# Altium PCB PCB1.PcbDoc
Units mil, origin at the board's own origin, x right, y up, seen from the top; angles counter-clockwise.
Board outline 6000 x 4000 mil, 2 copper layers (Top Layer, Bottom Layer); 12 components, 8 nets, 42 pads, 8 vias.
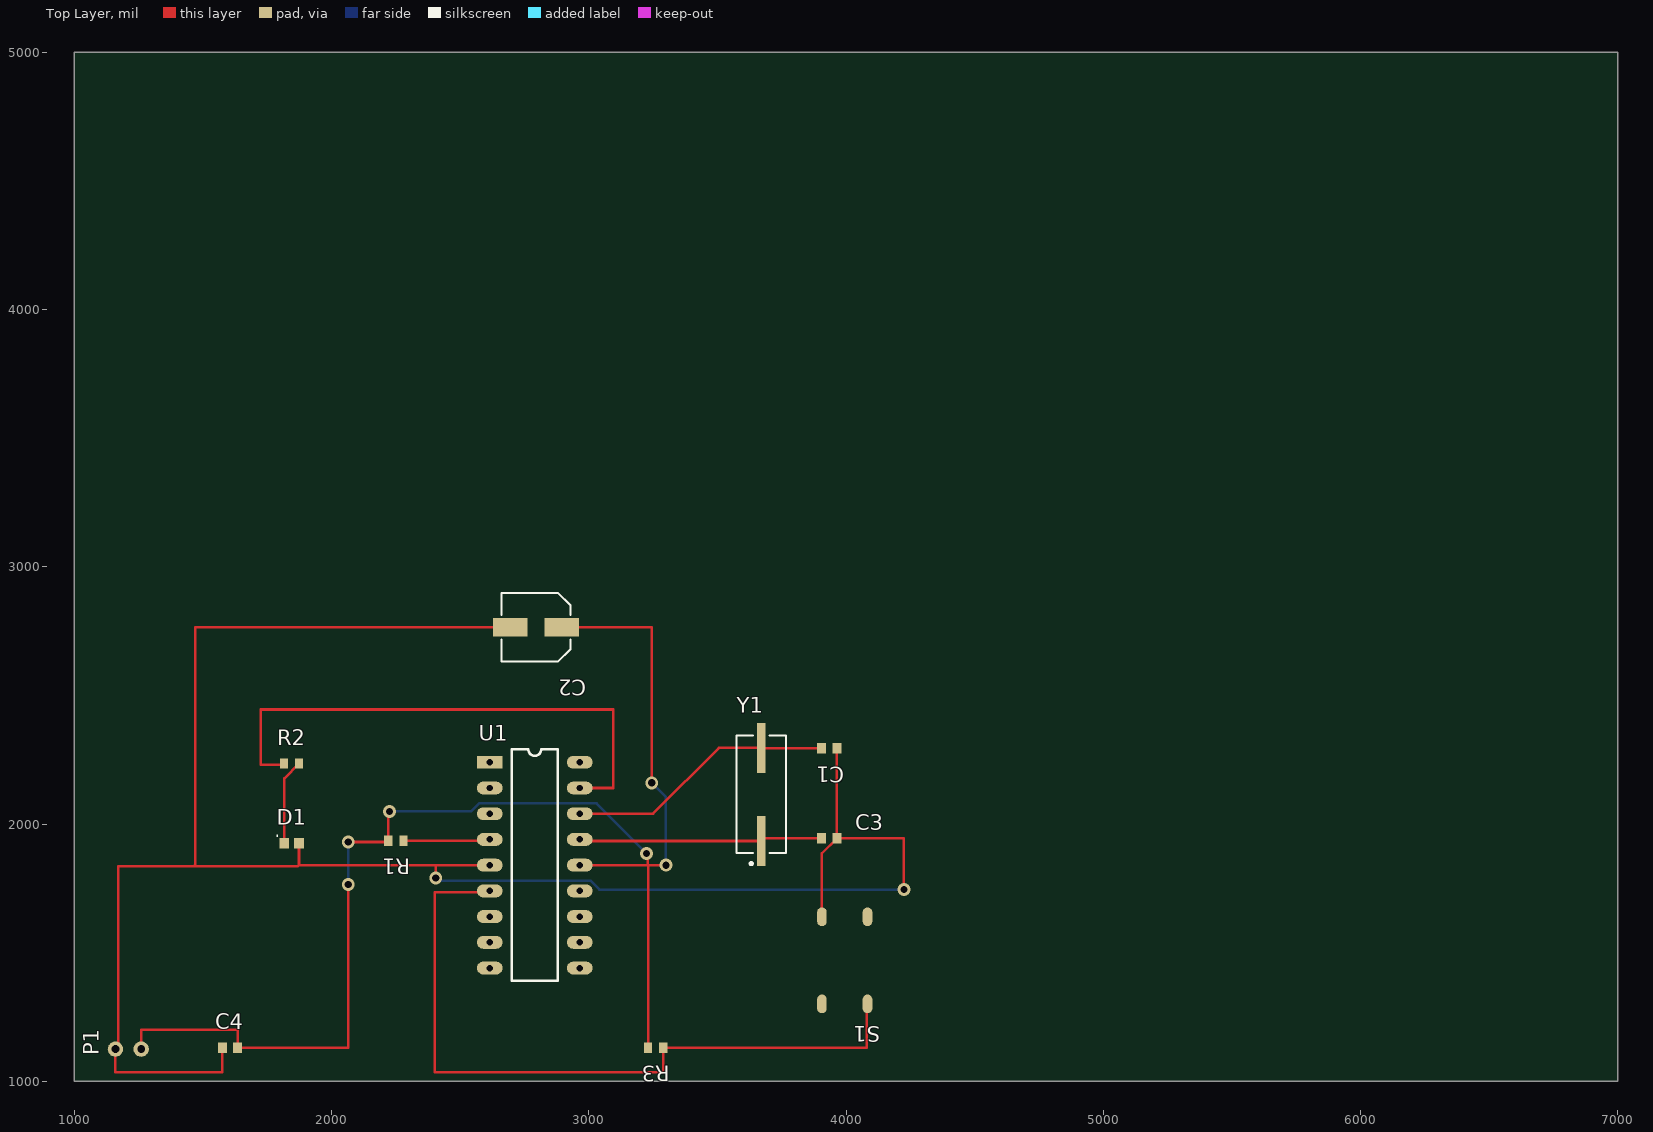
[diagram p0: Top Layer view]
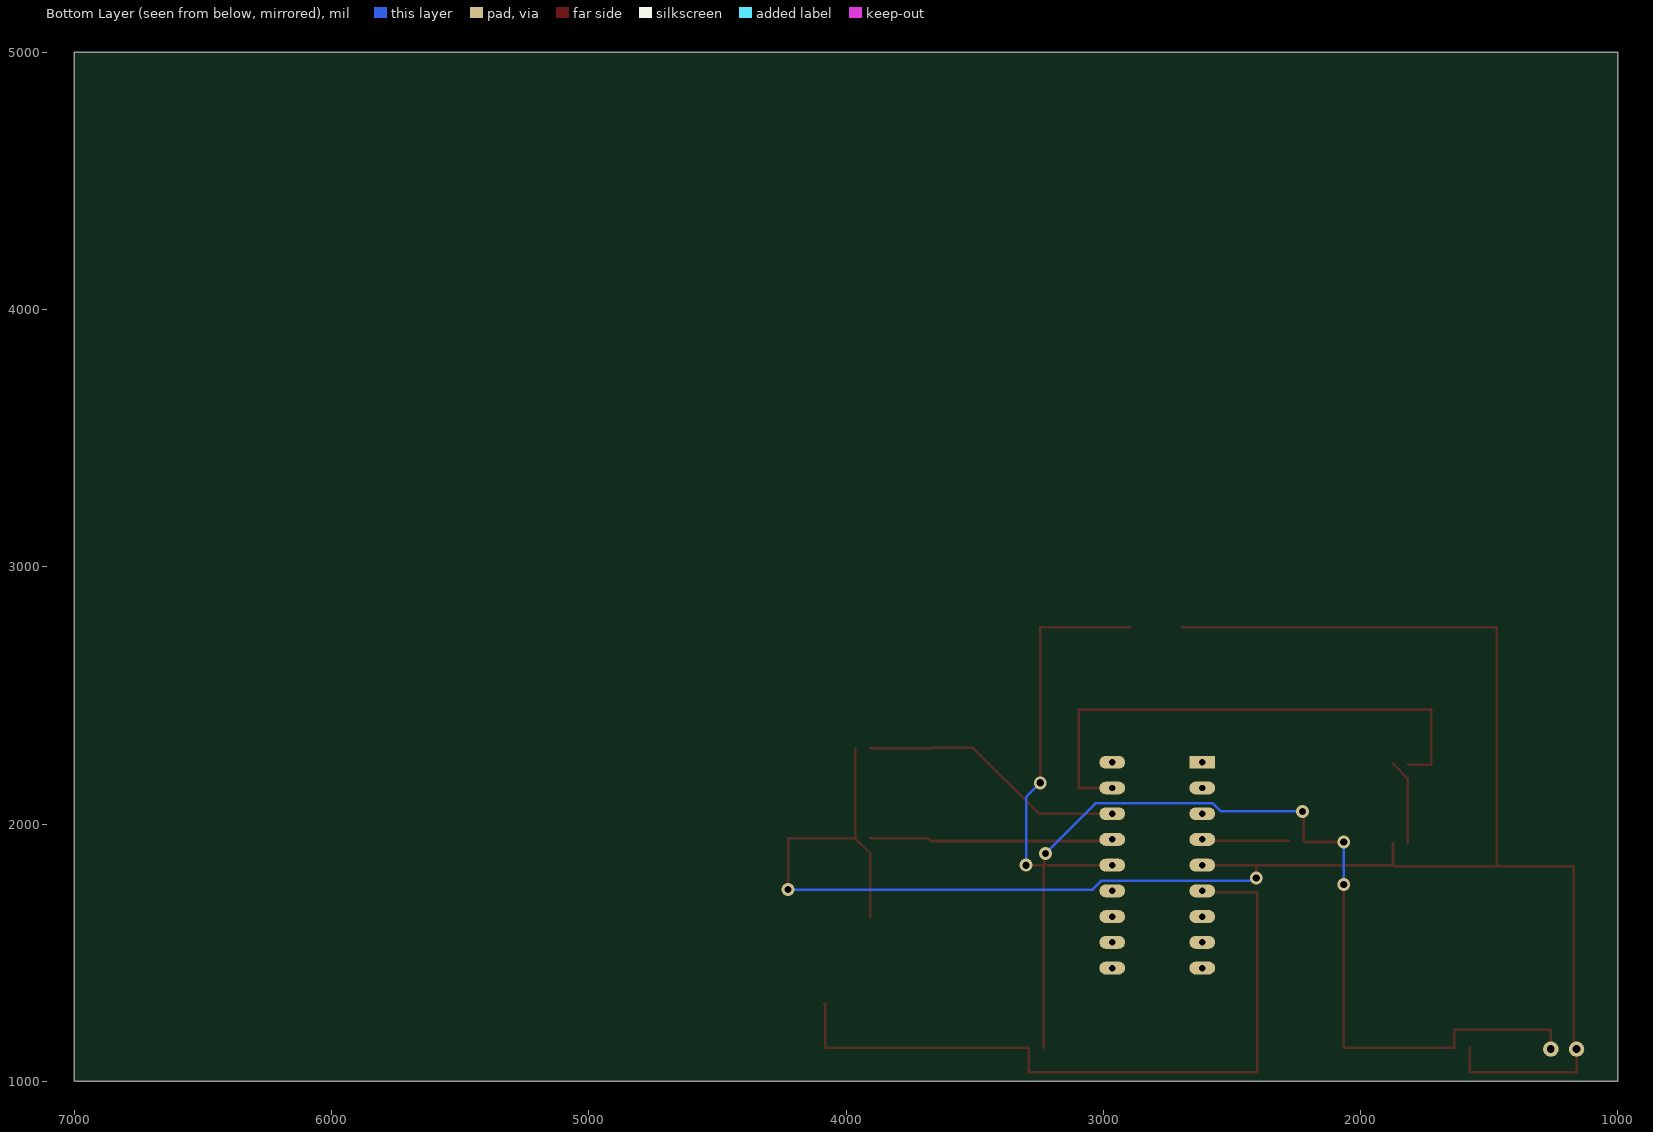
[diagram p1: Bottom Layer view, seen from below]

## Layer stack, top to bottom
Top Solder: solder mask 0.4, Solder Resist, Dk 3.5
Top Layer: signal copper 1.4
Dielectric 1: dielectric 12.6, FR-4, Dk 4.8
Bottom Layer: signal copper 1.4
Bottom Solder: solder mask 0.4, Solder Resist, Dk 3.5

## Board outline
1000,1000 7000,1000 7000,5000 1000,5000

## Design rules (kind name [scope] priority, off if disabled: settings)
Clearance [All] p1: gap=10 ignorepadtopadclearanceinfootprint=FALSE except(0: Arc-Hole Track-Hole SMDPad-Hole THPad-Hole Via-Hole Fill-Hole Poly-Hole Region-Hole Text-Hole)
PolygonConnect [All] p1: connectstyle=Relief reliefconductorwidth=10 reliefentries=4 polygonreliefangle="90 Angle" airgapwidth=10
RoutingVias [All] p1: holewidth=28 width=50 viastyle="Through Hole" minholewidth=28 minwidth=50 maxholewidth=28 maxwidth=50
SolderMaskExpansion [All] p1: expansion=4
Width [All] p1: maxlimit=10 minlimit=10 preferedwidth=10
30 further rules are at their usual default settings.

## Components (designator, comment, footprint, x,y, rotation, side; value= is the part's Value field where it differs from the comment)
C1 "18pF" capacitor0603nopolar 3935,2295 r180 top
C2 "Cap 10uF" cappolar_CM1H106M6L006VR 2795,2765 r180 top
C3 "18pF" capacitor0603nopolar 3935,1945 r180 top
C4 "100nF" capacitor0603nopolar 1605,1130 r0 top
D1 "LED-YEL-GRN" diode0603 1845,1925 r0 top
P1 "Header 2" header2,54 1260,1125 r90 top
R1 "10kΩ" resistor0603 2250,1935 r180 top
R2 "604Ω" resistor0603 1844.53,2235 r0 top
R3 "10kΩ" resistor0603 3260,1130 r180 top
S1 "SW-SPST" switch 3995,1470 r270 top
U1 "PIC16F84A" DIP18 2615,2240 r0 top
Y1 "4MHz" oscilator_XTAL003071 3670,2115 r90 top

## Footprints (in the part's own frame and the unit in brackets; to place one, negate y for a bottom-side part, rotate by r counter-clockwise, add the part's x,y. Pads: shape width x height; smd on the part's side, far side on the other; paste and mask are expansions set on the pad)
capacitor0603nopolar [mm]
  rect 0.9x1.05 smd: 1(-0.75,0) 2(0.75,0)
  body extent -0.85,-0.45 0.85,0.45, height 0.87
cappolar_CM1H106M6L006VR [mm]
  rect 3.4x1.85 smd: 1(-2.525,0) 2(2.525,0)
  silkscreen extent -3.4,-3.4 3.4,3.4, body extent -3.4,-3.4 3.4,3.4, height 6.3
diode0603 [mm]
  rect 0.95x1.05 smd: 1(-0.725,0) 2(0.725,0)
  silkscreen extent -1.46,0.69 -1.36,0.79, body extent -0.9,-0.45 0.9,0.45, height 1
DIP18 [mil]
  rect 100x50 hole 25: 1(0,0)
  oval 100x50 hole 25: 2(0,-100) 3(0,-200) 4(0,-300) 5(0,-400) 6(0,-500) 7(0,-600) 8(0,-700) 9(0,-800) 10(350,-800) 11(350,-700) 12(350,-600) 13(350,-500) 14(350,-400) 15(350,-300) 16(350,-200) 17(350,-100) 18(350,0)
  silkscreen extent 85,-850 265,50, body extent 85,-850 265,50, height 169
header2,54 [mil]
  round 60 hole 30: 1(0,100) 2(0,0)
oscilator_XTAL003071 [mm]
  rect 4.95x0.85 smd: 1(-4.6,0) 2(4.6,0)
  silkscreen extent -6.95,-2.45 5.8,2.45, body extent -5.8,-2.45 5.8,2.45, height 4.3
resistor0603 [mm]
  rect 0.8x1 smd: 1(-0.75,0) 2(0.75,0)
  body extent -0.85,-0.45 0.85,0.45, height 0.6
switch [mm]
  oval 1.85x0.95 smd: 1(-4.3,2.25) 2(-4.3,-2.25) 3(4.3,-2.25) 4(4.3,2.25)
  body extent -3.25,-3.25 3.25,3.25, height 4.6

## Part data
C1 C3: library part "Cap 18pF", "Capacitor", Manufacturer=WALSIN, Manufacturer symbol=0603N180G500CT, Package=0603, Temperature=-55...125°C, Tolerance=±2%, Voltage=50V, Supplier=tme.pl, Supplier symbol=0603N180G500CT
C2: "Capacitor", Capacity=10µF, Manufacturer=SAMWHA, Manufacturer symbol=CM1H106M6L006VR, Temperature=-55...105°C, Tolerance=±20%, Voltage=50V, Size=O6,3x5,8mm, Supplier=tme.pl, Supplier symbol=CM1H106M6L006VR
C4: library part "Cap 100nF", "Capacitor", Manufacturer=WALSIN, Manufacturer symbol=0603B104K101CT, Package=0603, Temperature=-55...125°C, Tolerance=±10%, Voltage=100V, Supplier=tme.pl, Supplier symbol=0603B104K101CT
D1: "Typical INFRARED GaAs LED", Color=¿ó³to-zielony, Current=20mA, Manufacturer=EVERLIGHT, Manufacturer symbol=19-21SYGC/S530-E1/4T, Package=0603, Voltage=1,7...2,4V, Supplier=tme.pl, Supplier symbol=19-21SYGC/S530-E1
P1: "Header, 2-Pin", Manufacturer="TE CONNECTIVITY", Manufacturer symbol=825433-2, Montage=THT, Orientation=Straight, Pins=2, Supplier=tme.pl, Supplier symbol=825433-2, Type=Male
R1 R3: library part "Resistor 10Kohm", "Resistor", Manufacturer="ROYAL OHM", Manufacturer symbol=HP03W5F1002T5E, Package=0603, Resistance=10k?, Temperature=-55...155°C, Tolerance=±1%, Voltage=50V, Montage=SMD, Supplier=tme.pl, Supplier symbol=HP03-10K1%, Type="thick film"
R2: library part "Resistor 604ohm", "Resistor", Manufacturer=WALSIN, Manufacturer symbol=WR06X6040FTL, Package=0603, Resistance=604?, Temperature=-55...155°C, Tolerance=±1%, Voltage=75V, Montage=SMD, Supplier=tme.pl, Supplier symbol=WR06X6040FTL, Type="thick film"
S1: "Single-Pole, Single-Throw Switch", Manufacturer="NKK SWITCHES", Manufacturer symbol=HP0315AFKP2-S, Temperature=-20...70°C, Dimensions=6,2x6,2x4,4mm, Height=4,4mm, Supplier=tme.pl, Supplier symbol=HP0315AFKP2-S
U1: "Microchip", Frequency=4MHz, Manufacturer="MICROCHIP TECHNOLOGY", Manufacturer symbol=PIC16F84A-04/P, Package=DIP18, Temperature=0..70°C, Voltage="4...5,5V DC", Montage=THT, Supplier=tme.pl, Supplier symbol=PIC16F84A-04/P
Y1: library part "Oscylator 4MHz", "Crystal Oscillator", Capacity=16pF, Manufacturer="IQD FREQUENCY PRODUCTS", Manufacturer symbol="LF XTAL003071", Package=HC49SM, Power=0,5mW, Temperature=-10...60°C, Frequency=4MHz, Montage=SMD, Supplier=tme.pl, Supplier symbol=4.00M-SMDHC49R

## Via types
v1: diameter 50, hole 28, Top Layer to Bottom Layer, 8 vias

## Nets (pads, with @x,y where several pads share a name; then routed paths per layer and width w, separated by ;. In a path a pad name is that pad's centre, name@x,y a point inside that pad or via, vN(x,y) a via of type N, cw(c..) or ccw(c..) an arc to the next point about the centre after c; other vN are vias at no path point)
+5V: C2.1 C4.2 P1.2 R1.2 R3.2 U1.14 | length 5522.5
  Top Layer w10: P1.2 1260,1200 1635,1200 1635,1130.47 C4.2 2065,1130 v1(2065,1765) ; v1(2065,1930) 2215.47,1930 R1.2 2220.47,2044.53 v1(2225,2049.05) ; C2.1 3245,2765 v1(3245,2160) ; U1.14@2975,1850 U1.14 3230,1840 ; v1(3225,1885) 3230,1880 3230,1840 ; R3.2 3230.47,1839.53 3230,1840 ; v1(3300,1840) 3230,1840
  Bottom Layer w10: v1(2065,1765) v1(2065,1930) ; v1(2225,2049.05) 2542.49,2049.05 2573.43,2080 3030,2080 v1(3225,1885) ; v1(3245,2160) 3300,2105 v1(3300,1840)
GND: C1.1 C2.2 C3.1 C4.1 D1.2 P1.1 S1.2 U1.5 | length 8032.4
  Top Layer w10: C4.1 1575,1129.53 1575,1035 1160,1035 P1.1 1170.47,1135.47 1170.47,1835 1465,1835 ; D1.2 1873.54,1841.46 ; v1(2405,1790) 2405,1840 ; U1.5 2405,1840 ; C2.2 1470,2765 1470,1840 1465,1835 ; S1.2 3906.42,1886.35 3964.53,1944.46 C3.1 ; C1.1 C3.1 ; v1(4225,1745) 4225,1945 C3.1 ; 1465,1835 1867.09,1835 1873.54,1841.46 ; 1873.54,1841.46 1875,1840 2405,1840
  Bottom Layer w10: v1(2405,1790) 2415,1780 3006.57,1780 3041.57,1745 v1(4225,1745)
NetC1_2: C1.2 U1.16 Y1.2 | length 1047
  Top Layer w10: U1.16 3250,2040 3506.1,2296.1 Y1.2 3671.1,2295 C1.2
NetC3_2: C3.2 U1.15 Y1.1 | length 947.6
  Top Layer w10: U1.15 2971.1,1933.9 Y1.1 3681.1,1945 C3.2
NetD1_1: D1.1 R2.2 | length 333.9
  Top Layer w10: D1.1 1816.46,2177.4 R2.2
NetR1_1: R1.1 U1.4 | length 337.5
  Top Layer w10: R1.1 2610,1935 U1.4
NetR2_1: R2.1 U1.17 | length 2112.1
  Top Layer w10: R2.1 1810,2230 1725,2230 1725,2445 3095,2445 3095,2140 U1.17
NetR3_1: R3.1 S1.4 U1.6 | length 2862.1
  Top Layer w10: U1.6 2609.53,1734.53 2400.47,1734.53 2400.47,1035.47 3289.53,1035.47 R3.1 4080,1130 4080,1297.13 S1.4
pads on no net: S1.1 S1.3 U1.1 U1.2 U1.3 U1.7 U1.8 U1.9 U1.10 U1.11 U1.12 U1.13 U1.18